# EAGLE board Power Supply (EAGLE 9.6.2)
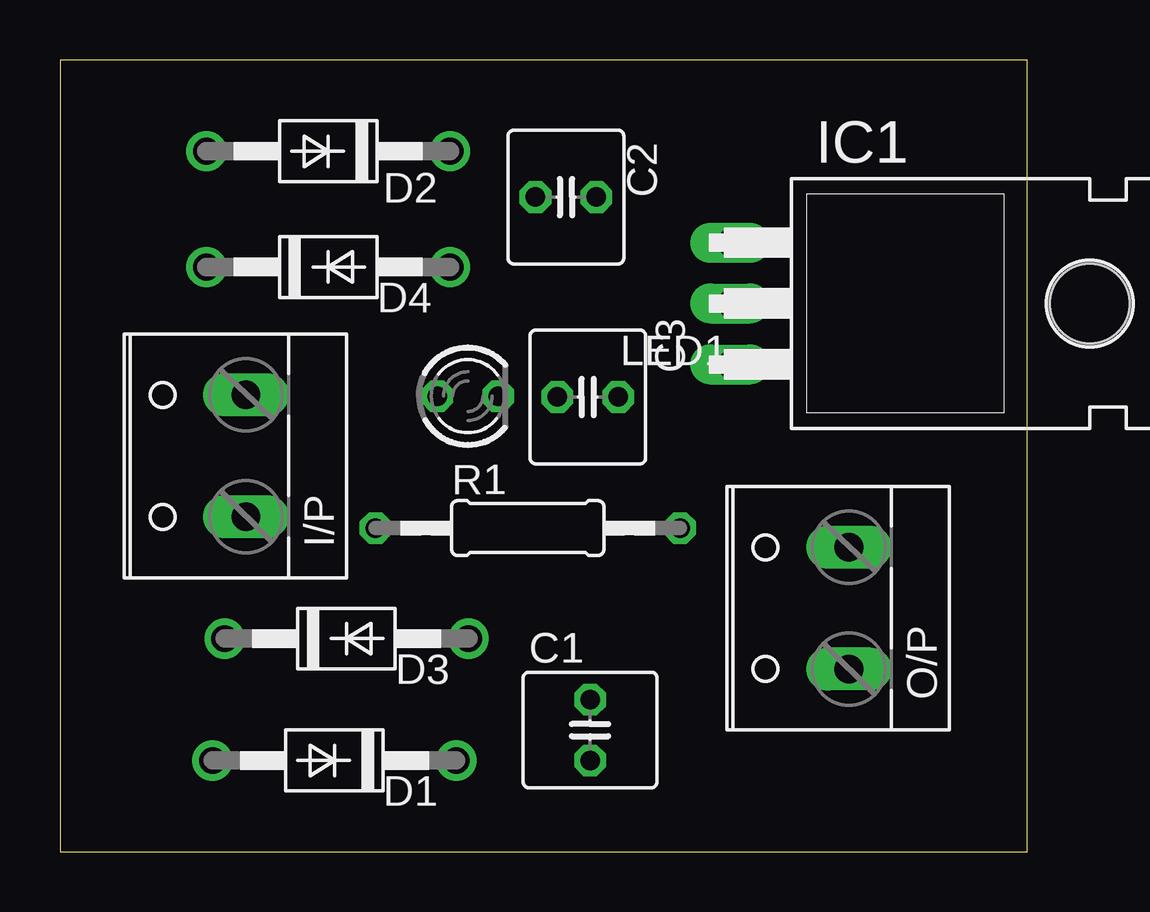
[diagram p0: board, top side]
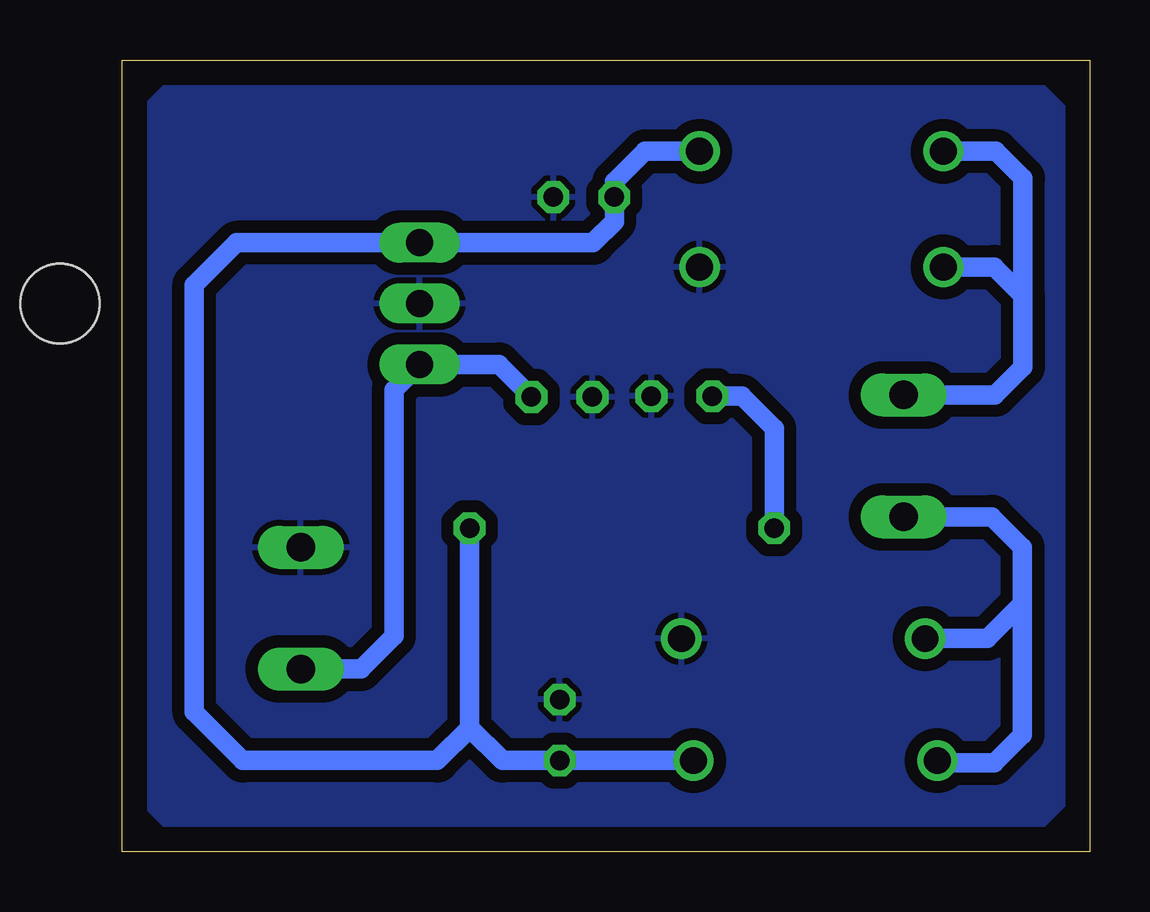
[diagram p1: board, bottom side, seen from below]

Size 40.33 x 33.01 mm. Coordinates in mm from the lower left corner, seen from the top.
Outline: 0,0 40.33,0.01 40.33,33.02 0,33.01 0,0
Copper layers (1*16): Top 0.035mm / dielectric 1.5mm / Bottom 0.035mm
Design rules "default *": minimum track width 10mil, minimum drill 24mil, track to track 20mil, track to pad 20mil, pad to pad 20mil, via to via 20mil, smd to smd 8mil, copper to edge 40mil, drill to drill 8mil, minimum pad ring 10mil, minimum via ring 8mil, stop-mask expansion 4mil, vias tented up to drill 0mil, thermal gap 10mil

## Footprints (pad centres in the part's own frame; a part is rotated, then mirrored left to right if it is on the bottom)
C025-060X050 = drill 0.813 octagon: 1 -1.27,0; 2 1.27,0
DO41-10 = drill 1.118: A 5.08,0; C -5.08,0
W237-132 = drill 1.194 long: 1 -2.54,-0.635; 2 2.54,-0.635
TO220H = drill 1.118 long: 1 -2.54,-10.16; 2 0,-10.16; 3 2.54,-10.16 | hole 3.302: 0,4.826
LED3MM = drill 0.813 octagon: A -1.27,0; K 1.27,0
0207/12 = drill 0.813 octagon: 1 -6.35,0; 2 6.35,0

## Placement (x,y rotation side)
C1  680uF  [C025-060X050]  22.1,5.08 90 top
C2  0.33uF  [C025-060X050]  21.09,27.3 0 top
C3  0.1uF  [C025-060X050]  22,18.97 180 top
D1  1N4004  [DO41-10]  11.44,3.81 180 top
D2  1N4004  [DO41-10]  11.18,29.21 180 top
D3  1N4004  [DO41-10]  11.95,8.89 0 top
D4  1N4004  [DO41-10]  11.18,24.38 0 top
I/P  12V AC  [W237-132]  7.12,16.51 90 top
IC1  7805T  [TO220H]  38.1,22.86 270 top
LED1  [LED3MM]  17,19 0 top
O/P  5V DC  [W237-132]  32.25,10.16 90 top
R1  1k  [0207/12]  19.5,13.5 0 top

## Library data of the parts
C1-C3 = rcl; SPICEPREFIX: C
D1-D4 = diode
I/P O/P = con-wago-508; OC_FARNELL: unknown; OC_NEWARK: unknown
IC1 = linear
LED1 = led
R1 = rcl; SPICEPREFIX: R

## Nets
GND: C1.2 C2.2 C3.2 D3.A D4.A IC1.2 LED1.K O/P.2
N$1: D1.A D3.C I/P.1
N$2: C1.1 C2.1 D1.C D2.C IC1.1 R1.2
N$3: LED1.A R1.1
N$4: C3.1 IC1.3 O/P.1
N$5: D2.A D4.C I/P.2

## Tracks (layer width: path | path; a pad name or v marks a point on that pad's centre or on a via)
GND
  pour Bottom: 1,31 1,2 2,1 38.5,1 39.5,2 39.5,31 38.5,32 2,32
N$1
  Bottom 0.813: I/P.1 4.08,13.97 2.81,12.7 2.81,10.4 2.81,10.36 | D1.A 6.26,3.71 3.98,3.71 2.81,4.88 2.81,10.36 | D3.C 4.28,8.89 2.81,10.36
N$2
  Bottom 0.813: D2.C 18.55,29.21 19.82,27.94 C2.1 19.82,26.28 20.7,25.4 IC1.1 35.56,25.4 37.33,23.63 37.33,5.83 35.31,3.81 27.2,3.81 25.85,5.16 25.85,5.18 | D1.C C1.1 24.48,3.81 25.85,5.18 | 25.85,5.18 R1.2
N$3
  Bottom 0.813: R1.1 13.15,17.65 14.5,19 LED1.A
N$4
  Bottom 0.813: C3.1 24.63,20.32 IC1.3 29,19.26 29,9 30.38,7.62 O/P.1
N$5
  Bottom 0.813: D2.A 3.91,29.21 2.78,28.08 2.78,23.18 | I/P.2 3.95,19.05 2.78,20.22 2.78,22.62 2.78,23.18 | D4.C 3.98,24.38 2.78,23.18